# Altium PCB FinalSUbsystemintroDesign.PcbDoc
Units mil, origin at the board's own origin, x right, y up, seen from the top; angles counter-clockwise.
Board outline 1540 x 1530 mil, 2 copper layers (Top Layer, Bottom Layer); 8 components, 7 nets, 25 pads, 5 vias.
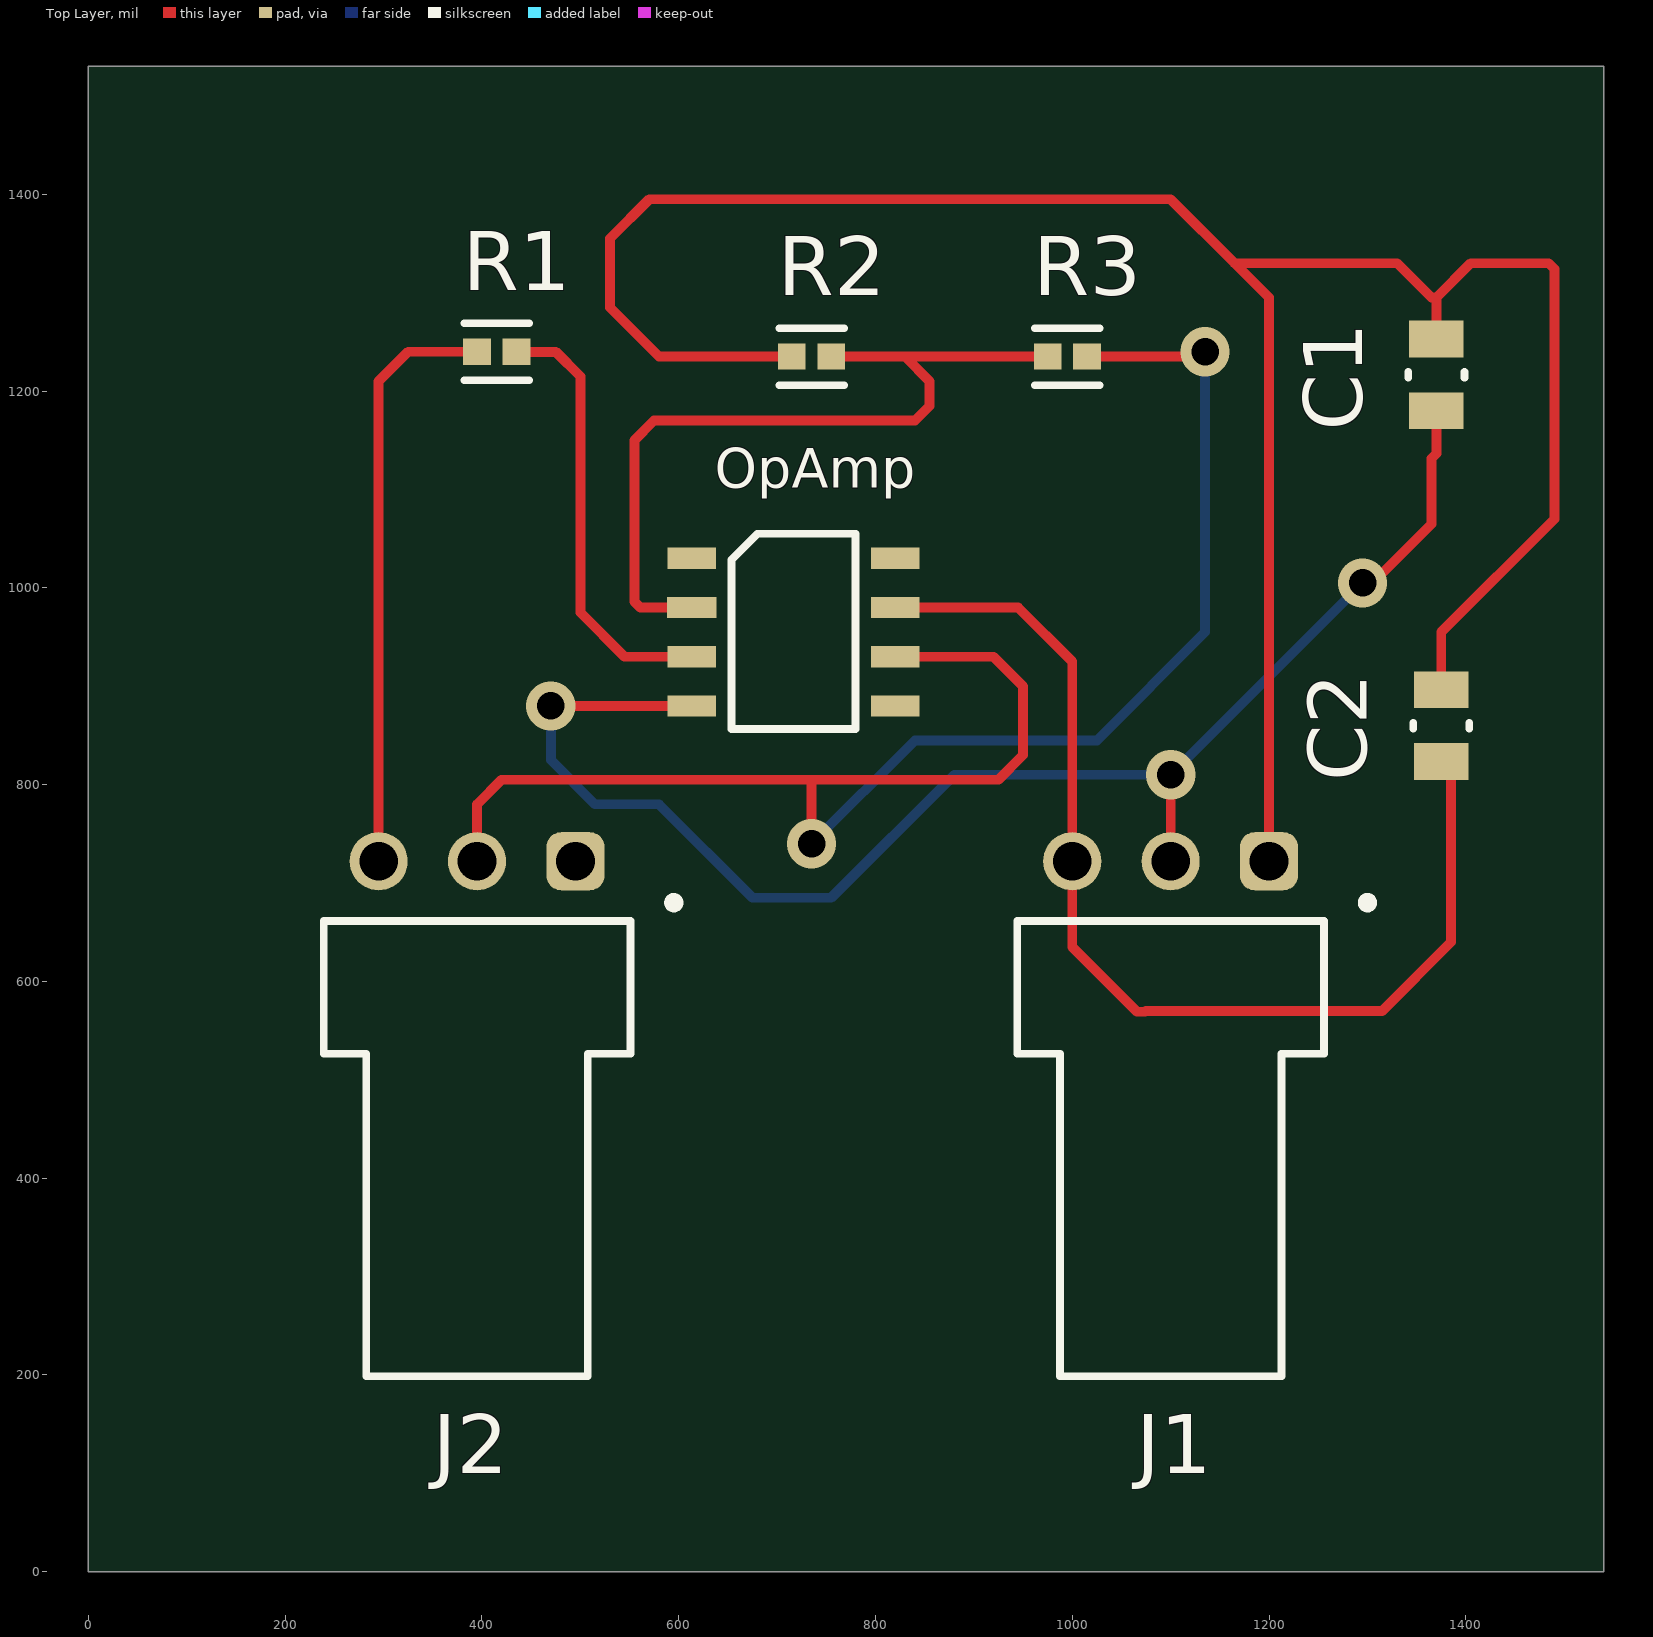
[diagram p0: Top Layer view]
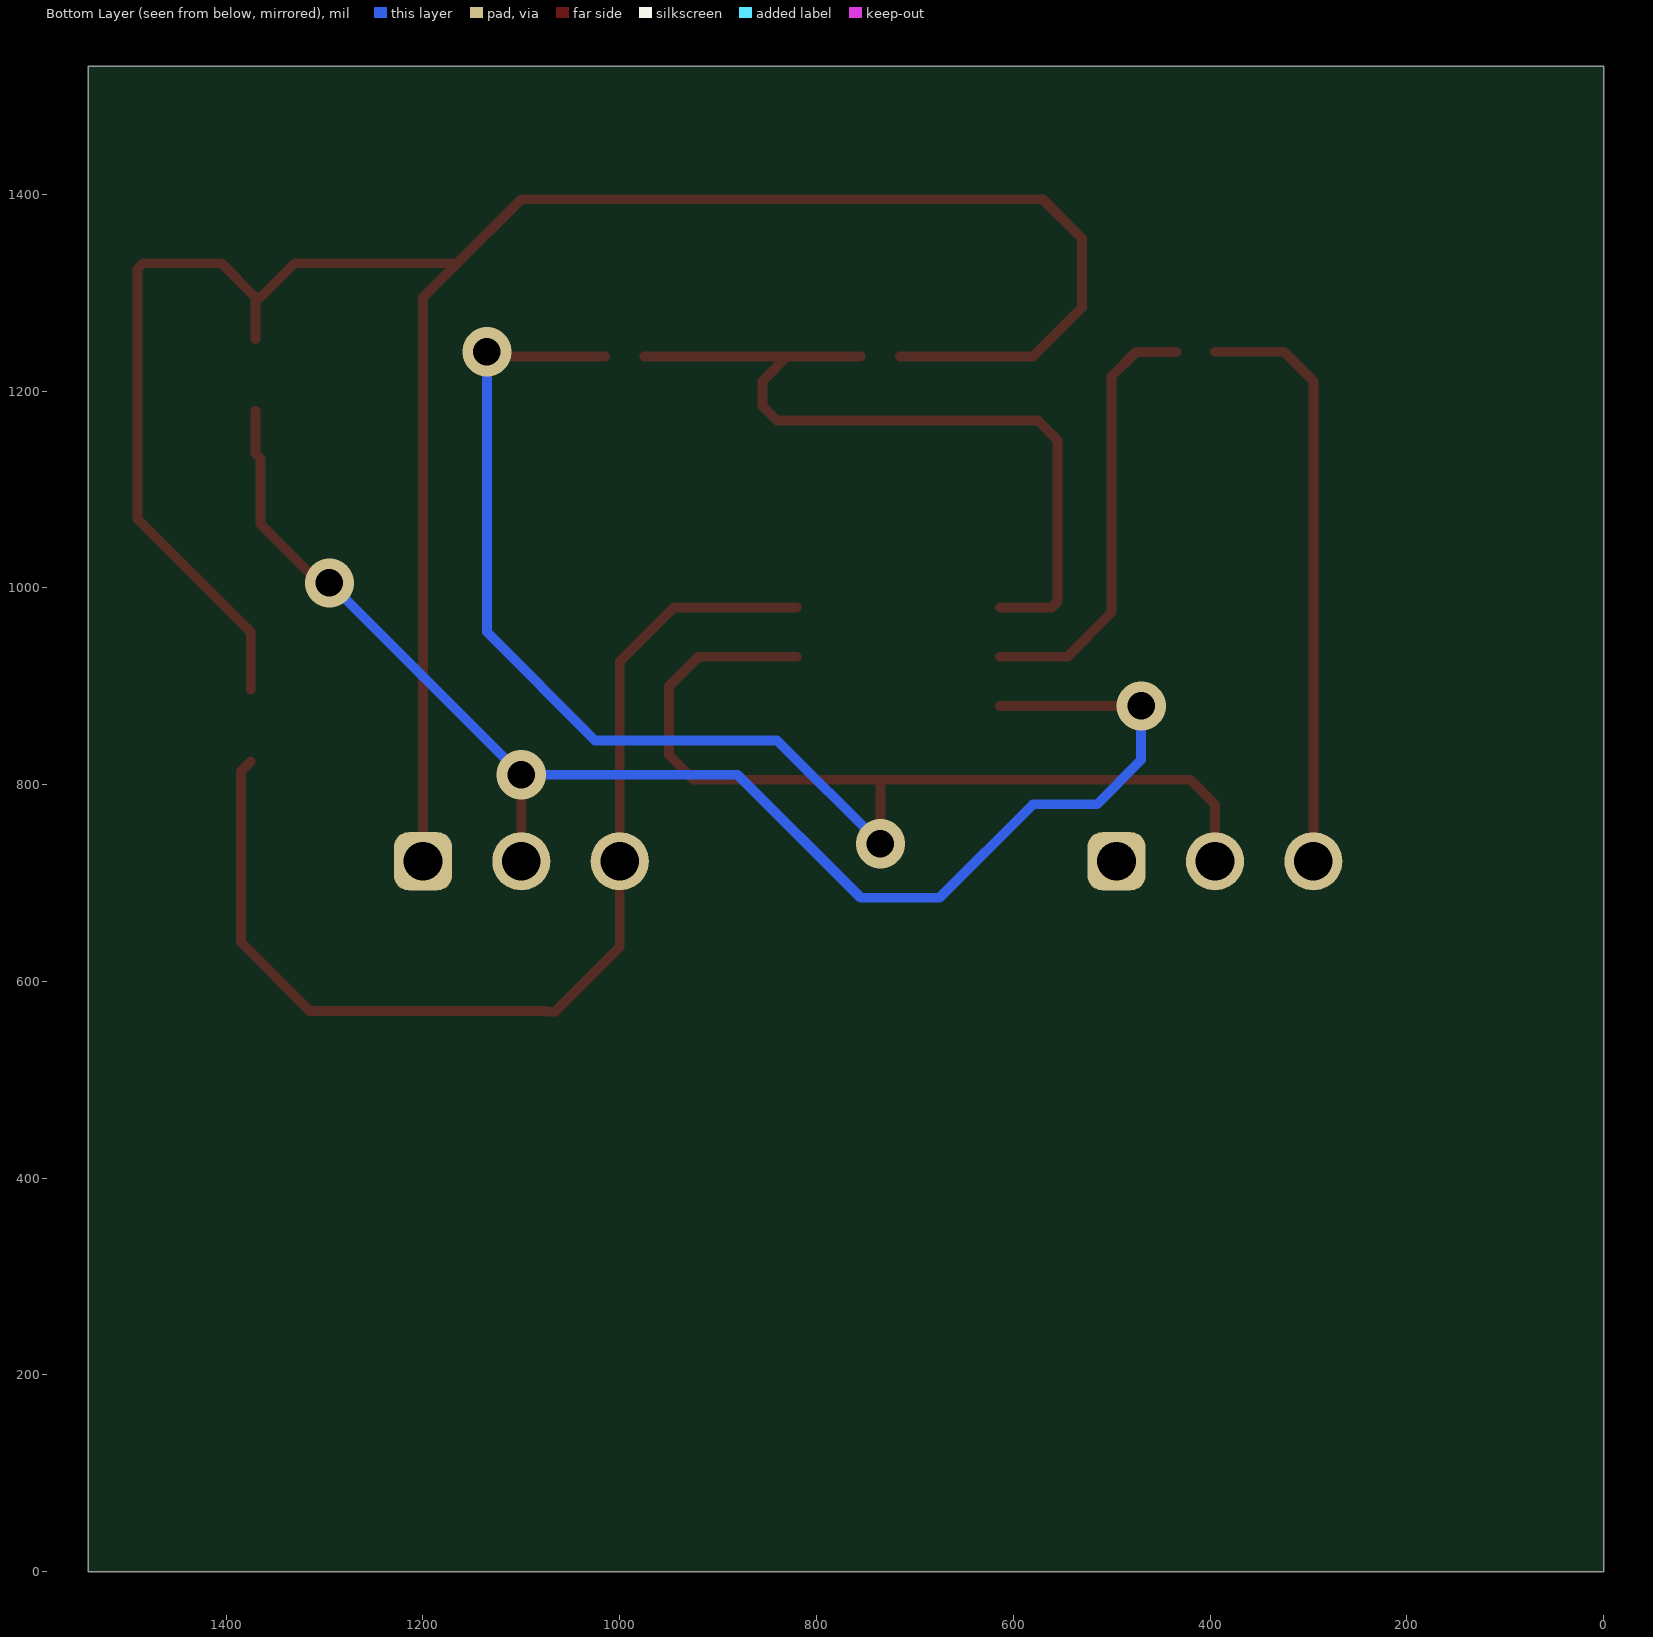
[diagram p1: Bottom Layer view, seen from below]
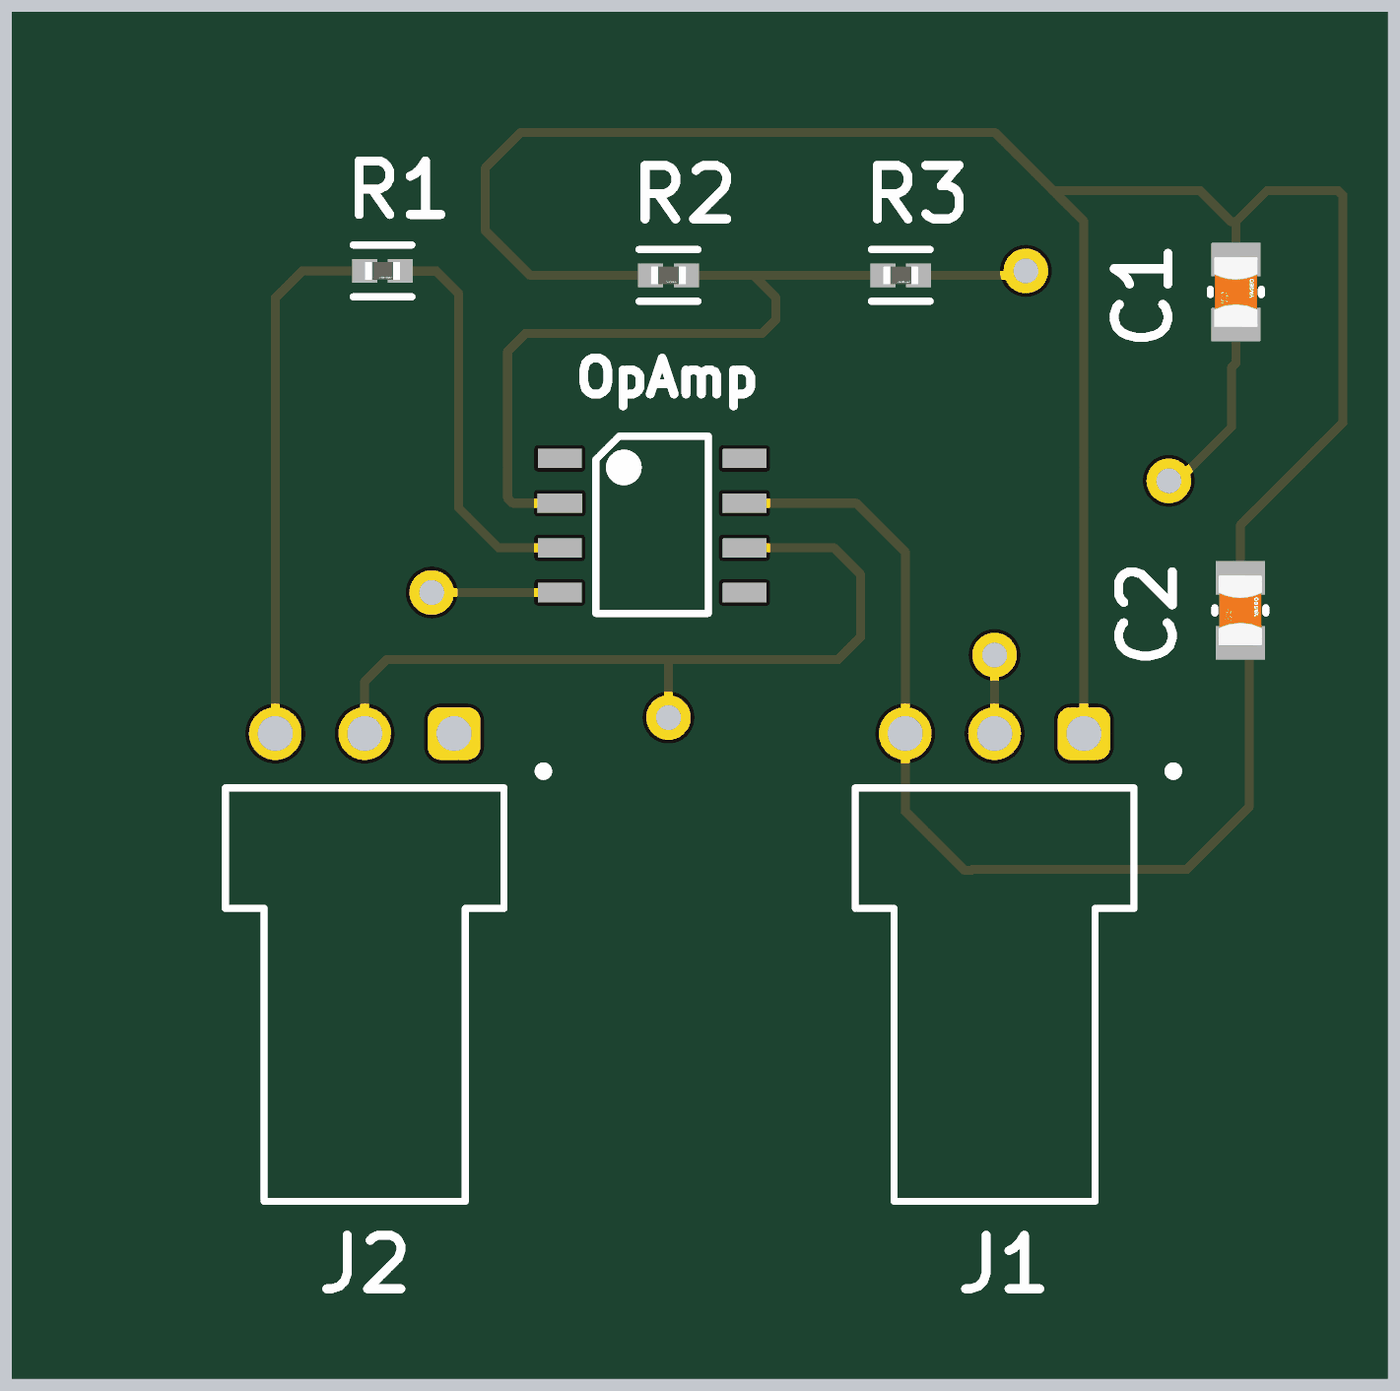
[diagram p2: 3D render of the assembled board from above, using the file's embedded part models]

## Layer stack, top to bottom
Top Solder: solder mask 0.4, Solder Resist, Dk 3.5
Top Layer: signal copper 1.4
Dielectric 1: dielectric 12.6, FR-4, Dk 4.8
Bottom Layer: signal copper 1.4
Bottom Solder: solder mask 0.4, Solder Resist, Dk 3.5

## Board outline
0,0 1540,0 1540,1530 0,1530

## Design rules (kind name [scope] priority, off if disabled: settings)
Clearance [All] p1: gap=10 ignorepadtopadclearanceinfootprint=FALSE
PolygonConnect [All] p1: connectstyle=Relief reliefconductorwidth=10 reliefentries=4 polygonreliefangle="90 Angle" airgapwidth=10
RoutingVias [All] p1: holewidth=28 width=50 viastyle="Through Hole" minholewidth=28 minwidth=50 maxholewidth=28 maxwidth=50
SolderMaskExpansion [All] p1: expansion=4 istentingtop=FALSE
SupplyNets "Schematic Supply Nets_3" [InNet('-12')] p1: voltage=0.000
SupplyNets "Schematic Supply Nets_2" [InNet('+12')] p2: voltage=0.000
SupplyNets "Schematic Supply Nets" [InNet('GND')] p3: voltage=0.000
Width [All] p1: maxlimit=10 minlimit=10 preferedwidth=10
30 further rules are at their usual default settings.

## Components (designator, comment, footprint, x,y, rotation, side; value= is the part's Value field where it differs from the comment)
C1 "" FP-CC0805-0_85-MFG 1370,1216.42 r90 top value="100 nF"
C2 "" FP-CC0805-0_85-MFG 1375,860 r90 top value="100 nF"
J1 "61900319521" 61900319521 1100,430 r0 top
J2 "61900319521" 61900319521 395,430 r0 top
OpAmp "" PCBComponent_1 650,855 r0 top (schematic designator *)
R1 "" FP-RC1005-IPC_A 415,1240 r0 top
R2 "" FP-RC1005-IPC_A 735,1235 r0 top
R3 "" FP-RC1005-IPC_A 995,1235 r0 top

## Footprints (in the part's own frame and the unit in brackets; to place one, negate y for a bottom-side part, rotate by r counter-clockwise, add the part's x,y. Pads: shape width x height; smd on the part's side, far side on the other; paste and mask are expansions set on the pad)
61900319521 [mm] "2.54mm Male Right Angled Locking Header Top Locking, 3p"
  rrect50% 1.5x1.5 hole 1: 1(2.54,7.42)
  round 1.5 hole 1: 2(0,7.42) 3(-2.54,7.42)
  silkscreen extent -3.96,-5.87 5.2,6.47
FP-CC0805-0_85-MFG [mm]
  rect 0.95x1.4 smd paste+0 mask+0: 1(-0.925,0) 2(0.925,0)
  silkscreen extent -0.08,-0.72 0.08,0.72, body extent -1.6,-1.05 1.6,1.05, height 0.25
FP-RC1005-IPC_A [mil]
  rect 28.16x26.48 smd paste+0 mask+0: 1(-20,0) 2(20,0)
  silkscreen extent -33,-29 33,29, body extent -41,-21 41,21, height 10
PCBComponent_1 [mm]
  rect 1.25x0.549 smd: 1(-0.932,4.445)
  rect 1.27x0.55 smd: 2(-0.932,3.175)
  rect 1.25x0.55 smd: 3(-0.932,1.905) 4(-0.932,0.635) 5(4.318,0.635) 6(4.318,1.905) 7(4.318,3.175) 8(4.318,4.445)
  round 1.016 on Top Overlay: ""(0.889,4.191)
  silkscreen extent 0.09,0.04 3.29,5.08

## Part data
C1 C2: library part CMP-2100-03606-3, "CAP CER 0.1UF 50V X7R 0805", Capacitance="100 nF", Manufacturer=Yageo, Manufacturer Part Number=CC0805KRX7R9BB104, Package=CC0805-0.85, Temperature="-30°C to +85°C", Temperature Characteristic=X7R, Temperature Range High=+85°C, Temperature Range Low=-30°C, Tolerance=0.1, Voltage Rating="50 V", Automotive=No, Category=Cap, ComponentLink2Description=Datasheet, ComponentLink2URL=http://www.yageo.com/documents/recent/UPY-GPHC_Y5V_6.3V-to-50V_8.pdf, Device Class L1="Passive Components", Device Class L2=Capacitors, Device Class L3="Ceramic Capacitors", Digikey Description="CAP CER 0.1UF 50V X7R 0805", Footprint Url=http://www.yageo.com/exep/pages/download/literatures/UPY-C_GEN_24.pdf, Height=0.95mm, Ipc Land Pattern Name=CAPC200125X85, Lead Free=Yes, Material=Ceramic, Mouser Description="Multilayer Ceramic Capacitors MLCC - SMD/SMT 100nF 50V X7R 10%", Octopart=https://octopart.com/cc0805krx7r9bb104-yageo-192993, RoHS=TRUE
J1 J2: library part CMP-1502-00600-2, Color=Beige, Contact Resistance=20mΩ, Current Rating=3A, Flammability Rating="UL94 V-0", Insulation Resistance=1GΩ, Max Operating Temperature=105°C, Min Operating Temperature=-40°C, Operating Supply Voltage=250V, Connector Type="Male Pin", Contact Gender=Male, Contact Material=Copper, Contact Mating Length=7.493mm, Contact Plating=Tin, Fastening Type=Friction, Gender=Male, Height=3.3mm, Housing Material=Nylon, Insulation=Insulated, Lead Free="Lead Free", Lead Pitch=2.54mm, Length=7.62mm, Mount="Through Hole", NexarPartId=18818224, Number of Contacts=3, Number of Pins=3, Number of Positions=3, Number of Rows=1, Packaging=Bulk, Pitch=2.54mm, REACH SVHC=Unknown, RoHS=Compliant, Termination="Through Hole", Voltage Rating=250V, Width=7.62mm
OpAmp: library part Component_1
R1 R2 R3: library part CMP-13261-004522-1, "Res Thick Film 0402 10kΩ 1% 0.063W ±100ppm/°C Molded SMD T/R", Case Code (Imperial)=0402, Case Code (Metric)=1005, Max Operating Temperature=155°C, Max Power Dissipation=63mW, Min Operating Temperature=-55°C, Package Quantity=1, Power Rating=62.5mW, Resistance=10kR, Temperature Coefficient=100ppm/°C, Tolerance=1%, Case/Package=0402, Composition="Thick Film", Contact Plating=Tin, Depth=0.5mm, Features="Moisture Resistant", Height=0.016inch, Length=1mm, Military Standard=Not, Mount="Surface Mount", Number of Terminations=2, Packaging="Tape and Reel", Radiation Hardening=No, Width=0.02inch

## Via types
v1: diameter 50, hole 28, Top Layer to Bottom Layer, 5 vias

## Nets (pads, with @x,y where several pads share a name; then routed paths per layer and width w, separated by ;. In a path a pad name is that pad's centre, name@x,y a point inside that pad or via, vN(x,y) a via of type N, cw(c..) or ccw(c..) an arc to the next point about the centre after c; other vN are vias at no path point)
+12: C2.1 J1.3 OpAmp.7 | length 1122.1
  Top Layer w10: OpAmp.7 945,980 1000,925 J1.3 1000,635 1065.86,569.14 1074.14,569.14 1075,570 1315,570 1385,640 1385,813.58 C2.1
-12: C1.1 J1.2 OpAmp.4 | length 1513.6
  Top Layer w10: v1(470,880) OpAmp.4 ; J1.2@1095,730 1095,727.13 1100,732.13 v1(1100,810) ; v1(1295,1005) 1305,1005 1365,1065 1365,1131.57 1370,1136.57 C1.1
  Bottom Layer w10: v1(470,880) 470,825 515,780 580,780 675,685 755,685 880,810 v1(1100,810) v1(1295,1005)
GND: C1.2 C2.2 J1.1 R2.1 | length 2450.5
  Top Layer w10: R2.1 580,1235 530,1285 530,1355 570,1395 1100,1395 1165,1330 ; J1.1 1200,1295 1165,1330 ; C1.2 1370,1295 ; C2.2 1375,955 1490,1070 1490,1324.14 1484.14,1330 1405,1330 1370,1295 ; 1165,1330 1330,1330 1365,1295 1370,1295
Net*_2: OpAmp.2 R2.2 R3.1 | length 819.7
  Top Layer w10: OpAmp.2 560.86,980 555,985.86 555,1150 575,1170 840,1170 855,1185 855,1210 830,1235 ; R2.2 830,1235 ; R3.1 830,1235
Net*_3: OpAmp.3 R1.2 | length 447.3
  Top Layer w10: R1.2@433.96,1239.68 473.96,1239.68 ; 475,1240 500,1215 500,975 545,930 OpAmp.3
Vin: J2.3 R1.1 | length 600.3
  Top Layer w10: J2.3 295,1210 325,1240 R1.1
Vout: J2.2 OpAmp.6 R3.2 | length 1807.1
  Top Layer w10: J2.2 395,780 420,805 735,805 ; v1(735,740) 735,805 ; OpAmp.6 920,930 950,900 950,830 925,805 735,805 ; R3.2 1130,1235 v1(1135,1240)
  Bottom Layer w10: v1(735,740) 840,845 1025,845 1135,955 v1(1135,1240)
pads on no net: J2.1 OpAmp. OpAmp.1 OpAmp.5 OpAmp.8